# Altium PCB PCB1.PcbDoc
Units mm, origin at the board's own origin, x right, y up, seen from the top; angles counter-clockwise.
Board outline 51.8 x 47.1 mm, 2 copper layers (Top Layer, Bottom Layer), stack 0.325 mm thick; 31 components, 45 nets, 179 pads, 72 vias.
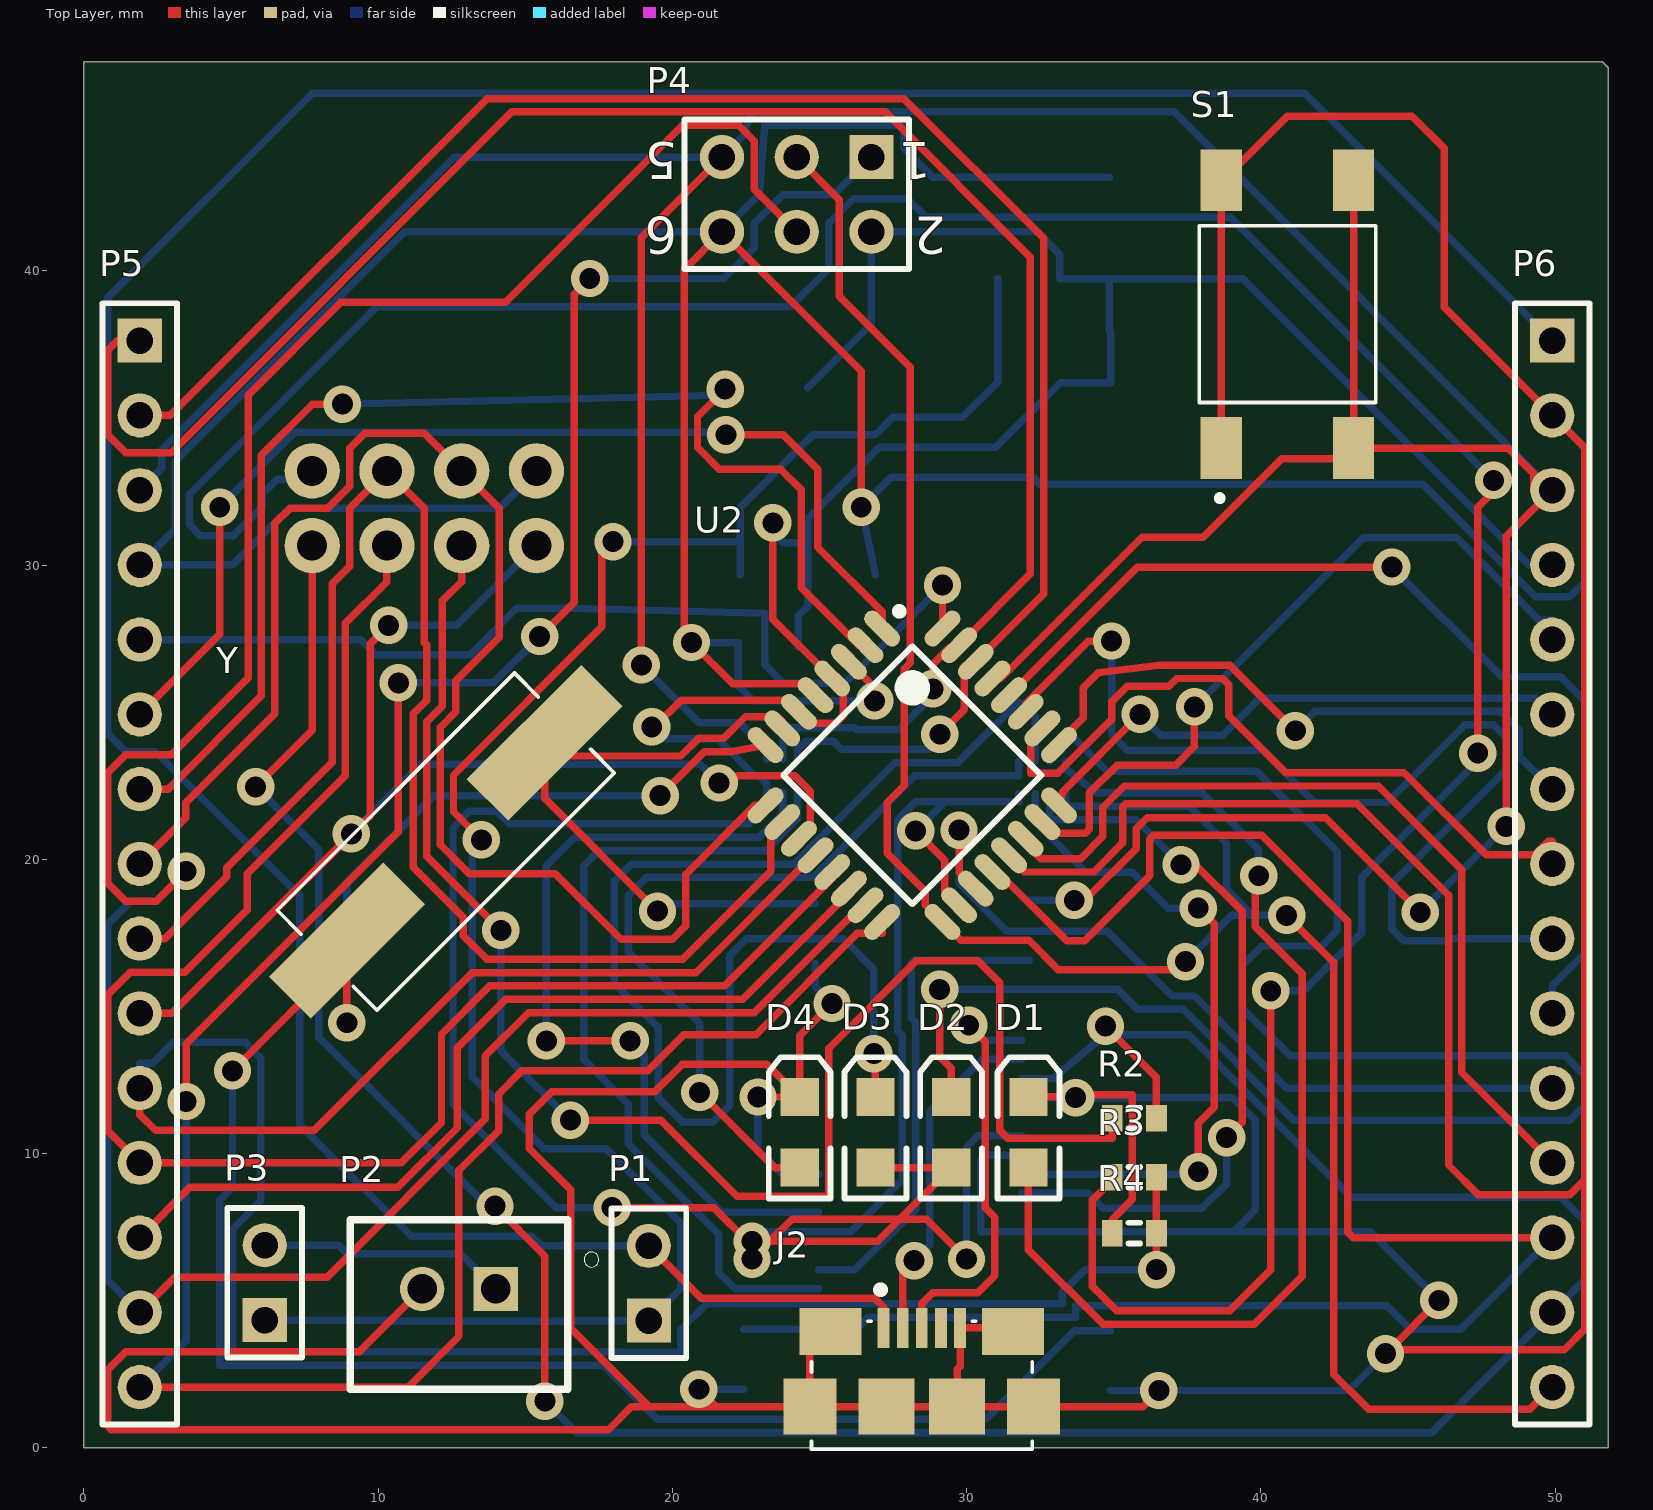
[diagram p0: Top Layer view]
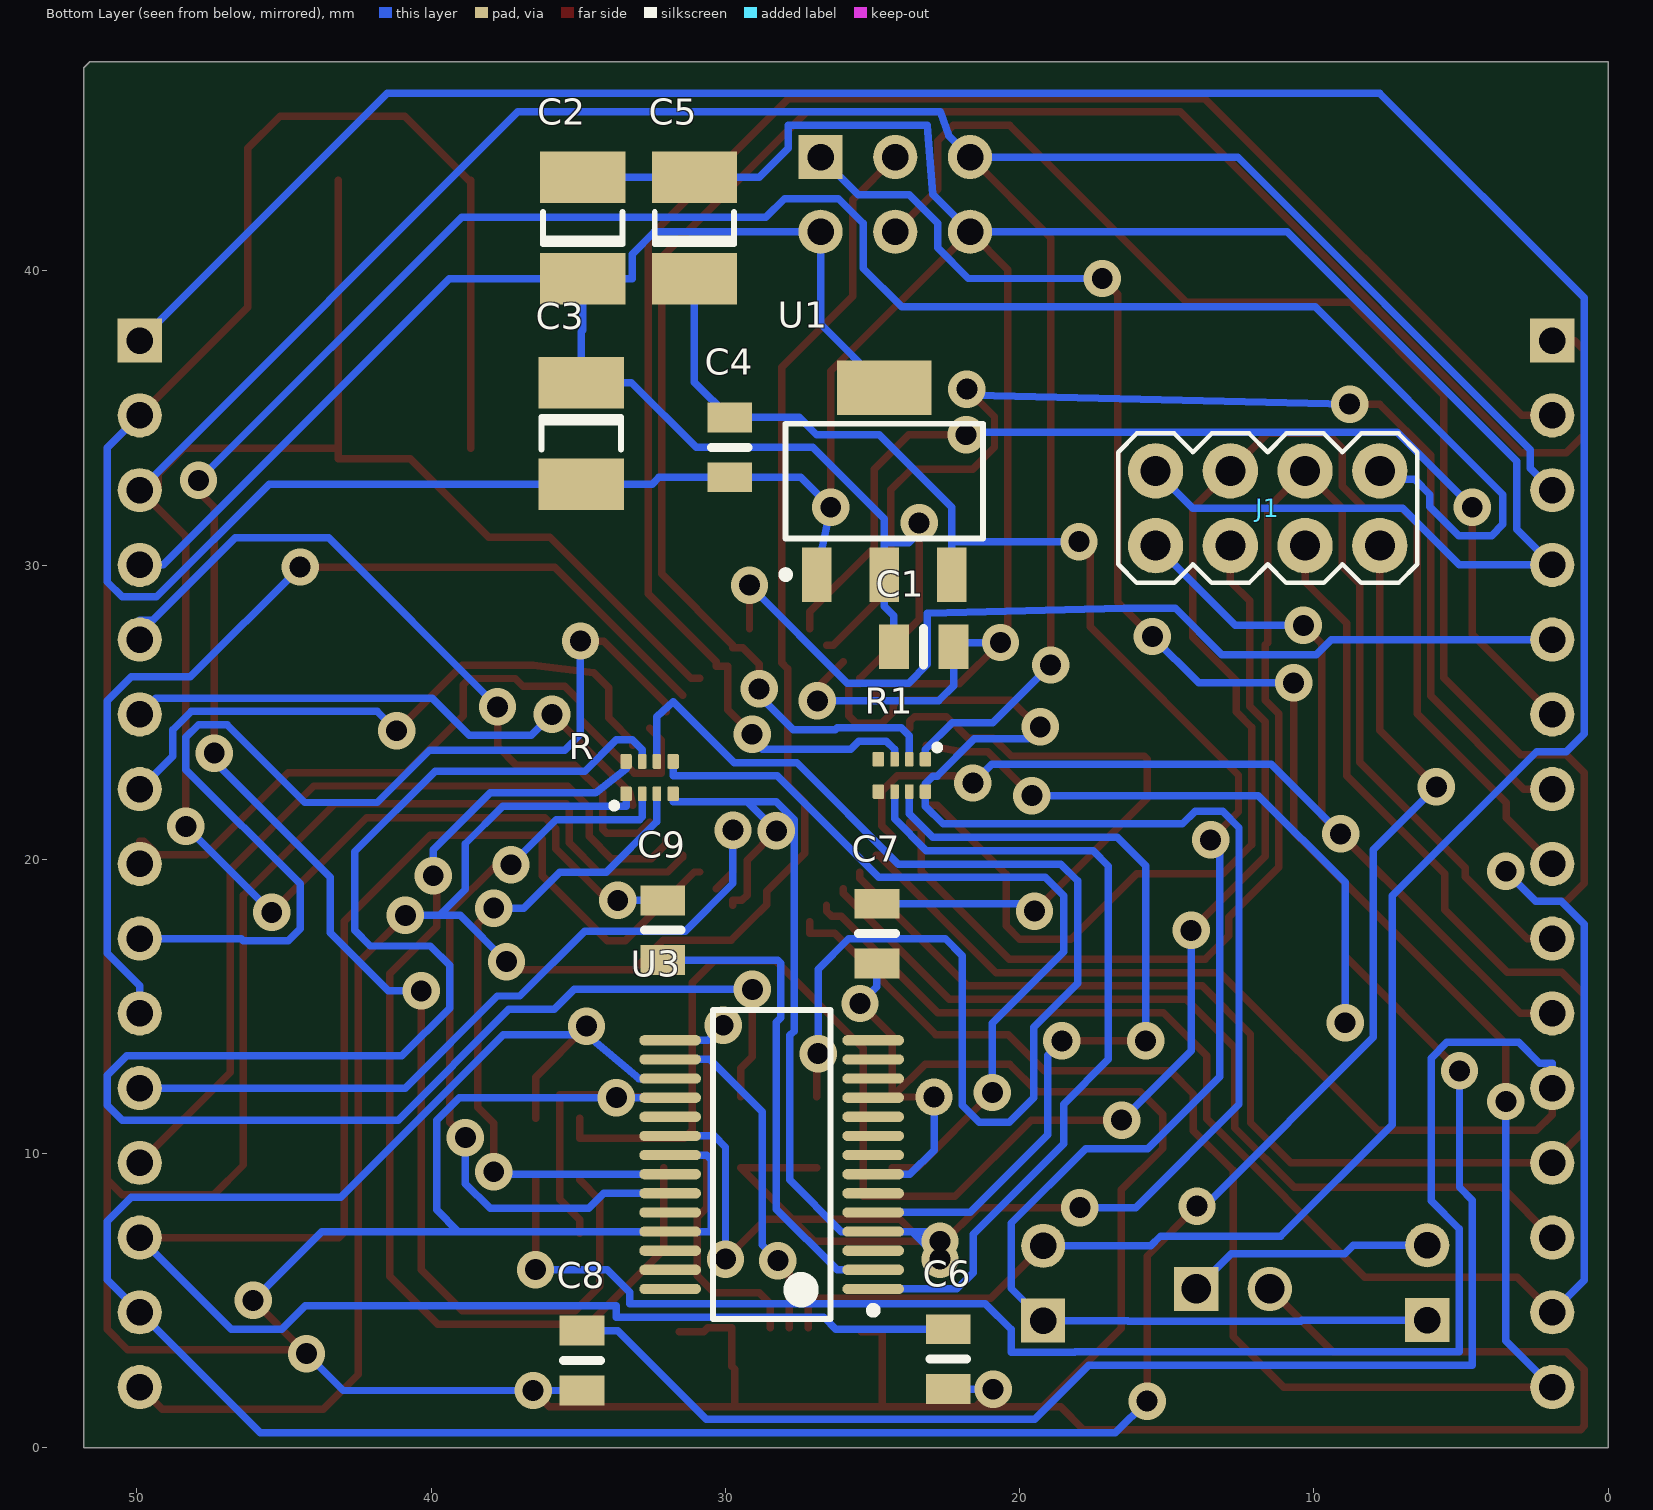
[diagram p1: Bottom Layer view, seen from below]
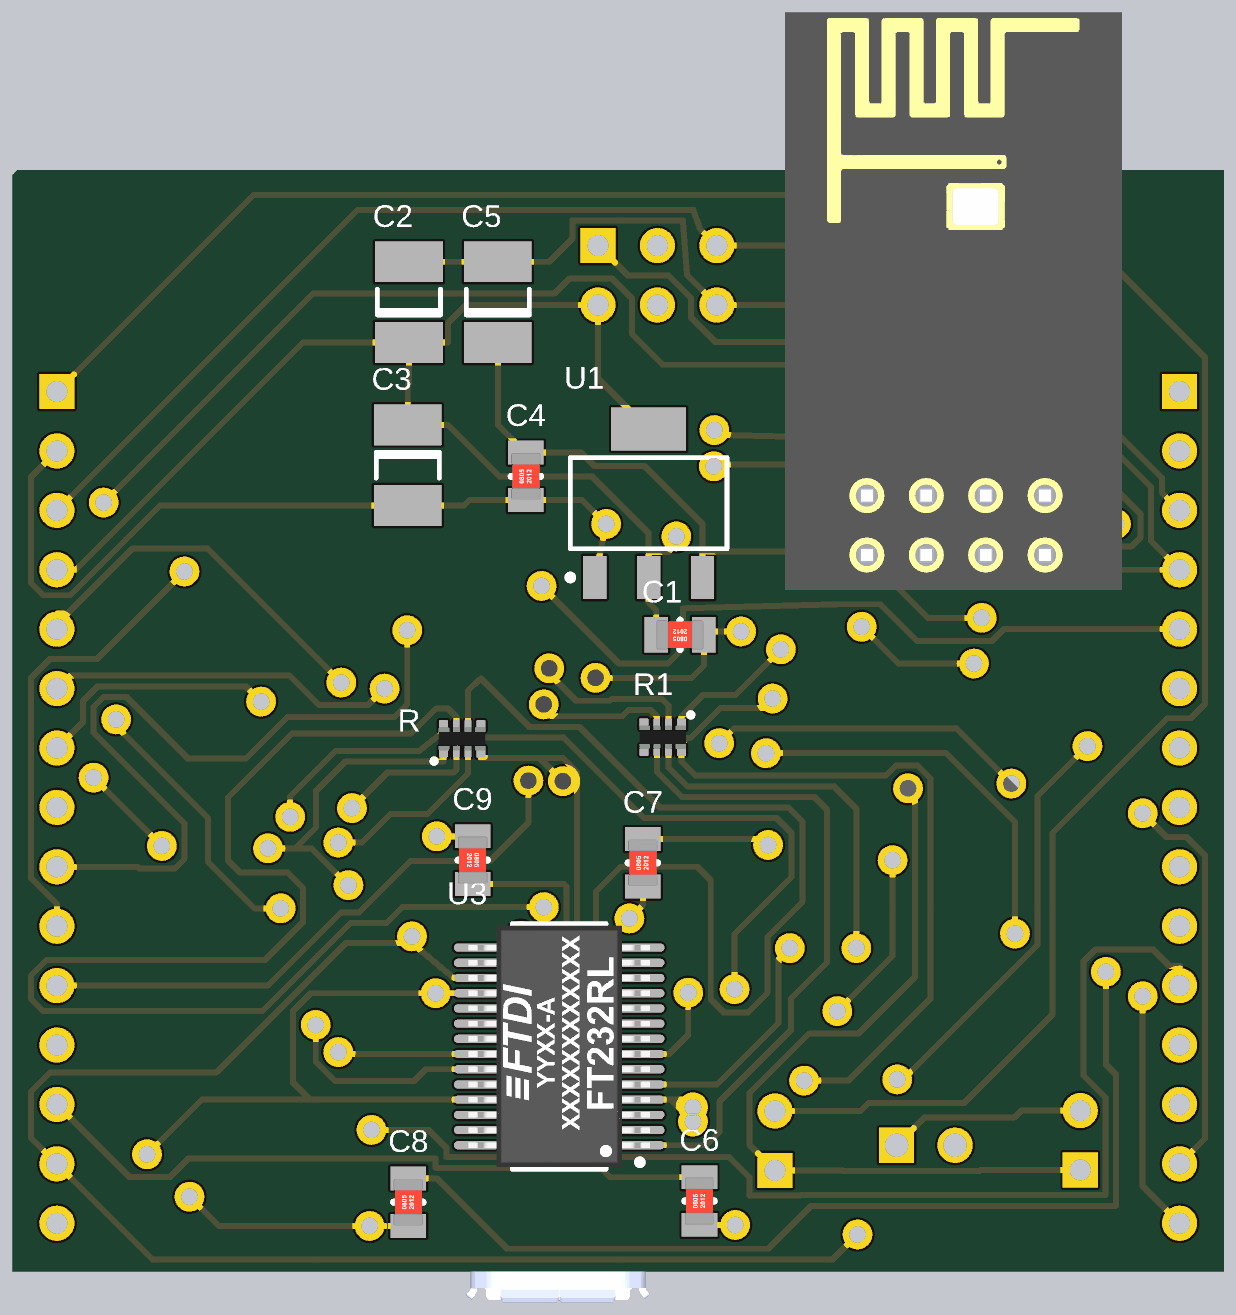
[diagram p2: 3D render of the assembled board from below, using the file's embedded part models]

## Layer stack, top to bottom
Top Solder: solder mask 0.0102, Solder Resist, Dk 3.5
Top Layer: signal copper 0.0356
Dielectric 1: dielectric 0.254, Dk 4.2
Bottom Layer: signal copper 0.0356
Bottom Solder: solder mask 0.0102, Solder Resist, Dk 3.5

## Board outline
0,0 0,47.1 51.6,47.1 51.8,46.9 51.8,0

## Design rules (kind name [scope] priority, off if disabled: settings)
Clearance [All] p1: gap=0.2 ignorepadtopadclearanceinfootprint=FALSE
PolygonConnect [All] p1: connectstyle=Relief reliefconductorwidth=0.254 reliefentries=4 polygonreliefangle="90 Angle" airgapwidth=0.254
RoutingVias [All] p1: holewidth=0.711 width=1.27 viastyle="Through Hole" minholewidth=0.711 minwidth=1.27 maxholewidth=0.711 maxwidth=1.27
SolderMaskExpansion [All] p1: expansion=0.102
Width [All] p1: maxlimit=0.254 minlimit=0.254 preferedwidth=0.254
30 further rules are at their usual default settings.

## Components (designator, comment, footprint, x,y, rotation, side; value= is the part's Value field where it differs from the comment)
C1 "100n" SMD-0805C 23.259,27.225 r90 bottom
C2 "49BC475B010M" 49BC-E 34.85,41.45 r90 bottom value=4.7uF
C3 "49BC475B010M" 49BC-E 34.9,34.475 r270 bottom value=4.7uF
C4 "100n" SMD-0805C 29.85,34 r180 bottom
C5 "49BC475B010M" 49BC-E 31.05,41.45 r90 bottom value=4.7uF
C6 "100n" SMD-0805C 22.425,3.016 r180 bottom
C7 "18pF" SMD-0805C 24.85,17.475 r180 bottom
C8 "18pF" SMD-0805C 34.875,2.966 r180 bottom
C9 "100n" SMD-0805C 32.125,17.591 r0 bottom
D1 "Orange" 2.0X1.25X0.8 32.1,10.725 r90 top
D2 "Red" 2.0X1.25X0.8 29.475,10.725 r90 top
D3 "Green" 2.0X1.25X0.8 26.9,10.725 r90 top
D4 "Blue" 2.0X1.25X0.8 24.325,10.725 r90 top
J1 "ESP-01" ESP-01 11.57,31.93 r180 bottom
J2 "10118192-0001LF" AMPHENOL_10118192-0001LF 28.475,4.075 r0 top
P1 "Header 2" HDR1X2 19.2,4.325 r90 top
P2 "XHP-2" JST_XHP-2 12.75,5.4 r0 top
P3 "Header 2" HDR1X2 6.146,4.343 r90 top
P4 "ICSP" HDR2X3 26.765,43.865 r180 top
P5 "Header 15" HDR1X15 1.9,37.625 r270 top
P6 "Header 15" HDR1X15 49.9,37.625 r270 top
R "MNR04M0APJ334" RESCAXS50P200X100X45-8N 32.575,22.775 r90 bottom
R1 "MNR04M0APJ334" RESCAXS50P200X100X45-8N 24,22.85 r270 bottom
R2 "Res3" J1-0603 35.7,11.2 r180 top value=10K
R3 "Res3" J1-0603 35.7,9.2 r0 top value=220
R4 "Res3" J1-0603 35.7,7.3 r180 top value=330
S1 "2-1437565-9" SW_2-1437565-9 40.9,38.525 r90 top
U1 "REG1117" TI-DCY4_N 24.6,32.85 r90 bottom
U2 "ATMEGA328P-AU" TQFP80P900X900X120-32N 28.154,22.857 r315 top
U3 "FT232RL-Tube" SSOP-28_N 28.425,9.625 r0 bottom
Y "ECS-160-S-5PX-TR" XTAL_ECS-160-S-5PX-TR 12.3,20.6 r45 top

## Footprints (in the part's own frame and the unit in brackets; to place one, negate y for a bottom-side part, rotate by r counter-clockwise, add the part's x,y. Pads: shape width x height; smd on the part's side, far side on the other; paste and mask are expansions set on the pad)
2.0X1.25X0.8 [mm] "SM LED; 2 Flat Leads"
  rect 1.3x1.3 smd: 1(-1.2,0) 2(1.2,0)
  silkscreen extent -2.25,-1.05 2.55,1.05
49BC-E [mm] "Chip Capacitor; Body 3.81 x 2.54 mm (LxW typ)"
  rect 1.75x2.9 smd: 1(-1.725,0) 2(1.725,0)
  silkscreen extent -0.55,-1.35 0.55,1.35
AMPHENOL_10118192-0001LF [mm]
  rect 0.4x1.35 smd: 1(-1.3,0) 2(-0.65,0) 3(0,0) 4(0.65,0) 5(1.3,0)
  rect 2.1x1.6 smd: SH1(-3.1,-0.125) SH2(3.1,-0.125)
  rect 1.8x1.9 smd: SH3(-3.8,-2.675) SH6(3.8,-2.675)
  rect 1.9x1.9 smd: SH4(-1.2,-2.675) SH5(1.2,-2.675)
  silkscreen extent -3.75,-4.13 3.75,1.4, body extent -3.96,-5.4 3.96,0.27, height 2.5
ESP-01 [mil]
  round 74 hole 40: 1(-150,-50) 2(-150,50) 3(-50,-50) 4(-50,50) 5(50,-50) 6(50,50) 7(150,-50) 8(150,50)
  silkscreen extent -200,-100 200,100, body extent -283,-110 283,862, height 256
HDR1X2 [mm] "Connector; Header; 2 Position"
  rect 1.5x1.5 hole 0.9: 1(0,0)
  round 1.5 hole 0.9: 2(2.54,0)
  silkscreen extent -1.27,-1.27 3.81,1.27
HDR1X15 [mm] "Connector; Header; 15 Position"
  rect 1.5x1.5 hole 0.9: 1(0,0)
  round 1.5 hole 0.9: 2(2.54,0) 3(5.08,0) 4(7.62,0) 5(10.16,0) 6(12.7,0) 7(15.24,0) 8(17.78,0) 9(20.32,0) 10(22.86,0) 11(25.4,0) 12(27.94,0) 13(30.48,0) 14(33.02,0) 15(35.56,0)
  silkscreen extent -1.27,-1.27 36.83,1.27
HDR2X3 [mm] "Connector; Header; 3x2 Position"
  rect 1.5x1.5 hole 0.9: 1(0,0)
  round 1.5 hole 0.9: 2(0,2.54) 3(2.54,0) 4(2.54,2.54) 5(5.08,0) 6(5.08,2.54)
  silkscreen extent -1.27,-1.27 6.35,3.81
J1-0603 [mm] "Chip Resistor, Body 1.6x0.8mm, IPC High Density"
  rect 0.7x0.9 smd: 1(-0.75,0) 2(0.75,0)
  silkscreen extent -0.2,-0.35 0.2,0.35, body extent -0.85,-0.48 0.85,0.48, height 0.9
JST_XHP-2 [mm]
  rect 1.508x1.508 hole 1: 1(1.25,0)
  round 1.508 hole 1: 2(-1.25,0)
  silkscreen extent -3.7,-3.4 4.75,2.35
RESCAXS50P200X100X45-8N [mm]
  rrect25% 0.5x0.39 smd: 1(-0.55,0.8) 4(-0.55,-0.8) 5(0.55,-0.8) 8(0.55,0.8)
  rrect25% 0.5x0.29 smd: 2(-0.55,0.25) 3(-0.55,-0.25) 6(0.55,-0.25) 7(0.55,0.25)
  silkscreen extent -1.05,1.1 -0.85,1.3, body extent -0.5,-1 0.5,1, height 0.36
SMD-0805C [mil]
  rect 60x40 smd: 1(0,40) 2(0,-40)
  silkscreen extent -25,0 25,0, body extent -25,-39 25,39, height 35
SSOP-28_N [mm] "SOP, 28-Leads, Body 10.2x5.3mm, Pitch 0.65mm, IPC Medium Density"
  oval 2.1x0.35 smd: 1(-3.45,4.225) 2(-3.45,3.575) 3(-3.45,2.925) 4(-3.45,2.275) 5(-3.45,1.625) 6(-3.45,0.975) 7(-3.45,0.325) 8(-3.45,-0.325) 9(-3.45,-0.975) 10(-3.45,-1.625) 11(-3.45,-2.275) 12(-3.45,-2.925) 13(-3.45,-3.575) 14(-3.45,-4.225) 15(3.45,-4.225) 16(3.45,-3.575) 17(3.45,-2.925) 18(3.45,-2.275) 19(3.45,-1.625) 20(3.45,-0.975) 21(3.45,-0.325) 22(3.45,0.325) 23(3.45,0.975) 24(3.45,1.625) 25(3.45,2.275) 26(3.45,2.925) 27(3.45,3.575) 28(3.45,4.225)
  silkscreen extent -3.57,-5.25 2,5.25, body extent -3.88,-5.16 3.88,5.17, height 2.16
SW_2-1437565-9 [mm]
  rect 2.1x1.4 smd: 1(-4.55,2.25) 2(4.55,2.25) 3(-4.55,-2.25) 4(4.55,-2.25)
  silkscreen extent -6.35,-3 3,3, body extent -5,-3 5,3, height 4.36
TI-DCY4_N [mm] "SOT223, 4-Leads, Body 6.5x3.5mm, Pitch 2.3mm, IPC Medium Density"
  rect 1.85x1 smd: 1(-3.175,2.3) 2(-3.175,0) 3(-3.175,-2.3)
  rect 1.85x3.2 smd: 4(3.175,0)
  silkscreen extent -3.3,-3.35 1.95,3.48, body extent -1.85,-3.35 1.85,3.35, height 1.8
TQFP80P900X900X120-32N [mm] "TQFP, 32-Leads, Body 7.00x7.00mm, Pitch 0.80mm, IPC Medium Density"
  oval 1.5x0.55 smd: 1(-4.25,2.8) 2(-4.25,2) 3(-4.25,1.2) 4(-4.25,0.4) 5(-4.25,-0.4) 6(-4.25,-1.2) 7(-4.25,-2) 8(-4.25,-2.8) 17(4.25,-2.8) 18(4.25,-2) 19(4.25,-1.2) 20(4.25,-0.4) 21(4.25,0.4) 22(4.25,1.2) 23(4.25,2) 24(4.25,2.8)
  oval 0.55x1.5 smd: 9(-2.8,-4.25) 10(-2,-4.25) 11(-1.2,-4.25) 12(-0.4,-4.25) 13(0.4,-4.25) 14(1.2,-4.25) 15(2,-4.25) 16(2.8,-4.25) 25(2.8,4.25) 26(2,4.25) 27(1.2,4.25) 28(0.4,4.25) 29(-0.4,4.25) 30(-1.2,4.25) 31(-2,4.25) 32(-2.8,4.25)
  silkscreen extent -4.37,-3.1 3.1,3.75, body extent -4.5,-4.5 4.5,4.5, height 1.6
XTAL_ECS-160-S-5PX-TR [mm]
  rect 5.5x2 smd: 1(-4.75,0) 2(4.75,0)
  silkscreen extent -5.7,-2.4 5.7,2.4, body extent -6.34,-2.49 6.46,2.51, height 4.5

## Part data
C1 C4 C6 C7 C8 C9: library part GQM2195C2A180JB01D, "CAP CER 18PF 100V NP0 0805", Digi-Key Part Number=490-3606-1-ND, Manufacturer="Murata Electronics North America", Operating Temperature="-55°C ~ 125°C", Package / Case="0805 (2012 Metric)", Ratings=-, Temperature Coefficient="C0G, NP0", Tolerance=±5%, Voltage=50V, @ qty=0, Applications="RF, Microwave, High Frequency", Datasheets=http://www.murata.com/~/media/webrenewal/support/library/catalog/products/capacitor/mlcc/c02e.pdf, Factory Stock=0, Features="High Q, Low Loss", Height - Seated (Max)=-, Image=//media.digikey.com/Renders/Murata%20Renders/0805(GxM9).jpg, Lead Spacing=-, Lead Style=-, Minimum Quantity=1, Mounting Type="Surface Mount, MLCC", Packaging="Cut Tape (CT)", Part Number=GQM2195C2A180JB01D, Part Status=Active, Quantity Available=8724, Series=GQM, Size / Dimension="0.079\" L x 0.049\" W (2.00mm x 1.25mm)", Thickness (Max)="0.037\" (0.95mm)", Unit Price (USD)=0.91
C2 C3 C5: "Conformal Coated Solid Tantalum Chip Capacitor: 4.7uF, 20% Tolerance, 10 WVDC @ -55°C to +85°C, Surge = 13V", ComponentLink1Description="Manufacturer Link", ComponentLink1URL=http://www.vishay.com/, DatasheetDocument=05-Jul-2002, Note="See Data Sheet for full range of components", PackageReference=49BC-E, Published=19-Mar-2004, Publisher="Altium Limited"
D1: library part HSMQ-C170, LED_Colour=Green, ComponentLink1Description="Manufacturer Link", ComponentLink1URL=http://www.avagotech.com/, ComponentLink2Description=Datasheet, ComponentLink2URL=http://cp.literature.agilent.com/litweb/pdf/5988-4832EN.pdf, DatasheetVersion=6-Apr-2002, LuminousIntensity="40mcd (Minimum).", PackageDescription="SM LED; 2 Flat Leads", PackageReference=2.0X1.25X0.8, PackageVersion=Oct-2001, PCB_Layout="Complies with manufacturer's recommendation.", Published=11-Dec-2002, Publisher="Altium Limited"
D2 D4: library part HSMQ-C170, "SMT Top Mount Chip LED, Green", LED_Colour=Green, ComponentLink1Description="Manufacturer Link", ComponentLink1URL=http://www.avagotech.com/, ComponentLink2Description=Datasheet, ComponentLink2URL=http://cp.literature.agilent.com/litweb/pdf/5988-4832EN.pdf, DatasheetVersion=6-Apr-2002, LuminousIntensity="40mcd (Minimum).", PackageDescription="SM LED; 2 Flat Leads", PackageReference=2.0X1.25X0.8, PackageVersion=Oct-2001, PCB_Layout="Complies with manufacturer's recommendation.", Published=11-Dec-2002, Publisher="Altium Limited"
D3: library part HSMQ-C170, "SMT Top Mount Chip LED, Green", ComponentLink1Description="Manufacturer Link", ComponentLink1URL=http://www.avagotech.com/, ComponentLink2Description=Datasheet, ComponentLink2URL=http://cp.literature.agilent.com/litweb/pdf/5988-4832EN.pdf, DatasheetVersion=6-Apr-2002, LED_Colour=Green, LuminousIntensity="40mcd (Minimum).", PackageDescription="SM LED; 2 Flat Leads", PackageReference=2.0X1.25X0.8, PackageVersion=Oct-2001, PCB_Layout="Complies with manufacturer's recommendation.", Published=11-Dec-2002, Publisher="Altium Limited"
J1: "ESP-01M ESP8266 DIP Adapter series Transceiver; 802.11 b/g/n (Wi-Fi, WiFi, WLAN) Evaluation Board", Package="Non-Standard AI-Thinker", Availability="Not in stock", Check_prices=https://www.snapeda.com/parts/ESP-01/AI-Thinker/view-part/?ref=eda, MF=AI-Thinker, MP=ESP-01, Price=None, SnapEDA_Link=https://www.snapeda.com/parts/ESP-01/AI-Thinker/view-part/?ref=snap
J2: "Micro USB, Input Output Connectors, B TYPE RECEPTACLE with flange", Package=None, Availability="In Stock", Check_prices=https://www.snapeda.com/parts/10118192-0001LF/Amphenol/view-part/?ref=eda, MF="AMPHENOL ICC / FCI", MP=10118192-0001LF, Price=None, SnapEDA_Link=https://www.snapeda.com/parts/10118192-0001LF/Amphenol/view-part/?ref=snap
P1 P3: "Header, 2-Pin", LatestRevisionDate=17-Jul-2002, LatestRevisionNote="Re-released for DXP Platform.", Publisher="Altium Limited"
P2: "XH Series 2 Position 2.5 mm Pitch Wire-to-Board Housing Connector", Package=None, Availability=Unavailable, MP=XHP-2, Price=None
P4: library part "Header 3X2", "Header, 3-Pin, Dual row", LatestRevisionDate=17-Jul-2002, LatestRevisionNote="Re-released for DXP Platform.", Publisher="Altium Limited"
P5 P6: "Header, 15-Pin", LatestRevisionDate=17-Jul-2002, LatestRevisionNote="Re-released for DXP Platform.", Publisher="Altium Limited"
R R1: "Res Array 330K Ohm 5% ±200ppm/°C ISOL Epoxy 8-Pin 0804(4 X 0402) Convex SMD Automotive T/R", Package="0402 Rohm", Availability=Unavailable, MF=Rohm, MP=MNR04M0APJ334, Price=None, SnapEDA_Link=https://www.snapeda.com/parts/MNR04M0APJ334/Rohm/view-part/472925/?ref=snap
R2 R3 R4: "Resistor", LatestRevisionDate=29-May-2009, LatestRevisionNote="IPC-7351 Footprint Added.", PackageDescription="Chip Resistor", PackageReference=J1-0603, Published=8-Jun-2000, Publisher="Altium Limited"
S1: Package=None, Availability=Unavailable, MF="{'manufacturer': 'TE Connectivity'}", MP=2-1437565-9, Price=None
U1: "Single Output LDO, 800 mA, Adjustable 1.5 to 13.5 V Output, 3.8 to 15 V Input, with Internal Current Limiting, 4-pin SOT-223 (DCY), -40 to 125 degC, Green (RoHS & no Sb/Br)", Manufacturer="Texas Instruments", Rating=Catalog, Supplier Part Number 1=REG1117-ND, Code_JEDEC=TO-261, ComponentLink1Description="Manufacturer URL", ComponentLink1URL=http://www.ti.com/, ComponentLink2Description=Datasheet, ComponentLink2URL=http://www.ti.com/general/docs/lit/getliterature.tsp?genericPartNumber=REG1117&fileType=pdf, ComponentLink3Description="Package Specification", ComponentLink3URL=http://www.ti.com/litv/pdf/mpds094a, DatasheetVersion=SBVS001D, Eco-Plan="Green (RoHS & no Sb/Br)", Iout(Max)(A)=0.8, Iq(Typ)(mA)=4, Mounting Technology="Surface Mount", PackageDescription="4-Pin Plastic Small Outline, Body 3.5 x 6.5 mm, Pitch 2.3 mm", PackageReference=DCY4, PackageVersion=4202506/B, PartNumber=REG1117, SubFamily="Single Channel LDO", Supplier 1=Digi-Key, Supplier 2=Farnell, Supplier 3=Newark, Supplier 4=Mouser, Supplier Part Number 2=1097566, Supplier Part Number 3=14P6981, Supplier Part Number 4=595-REG1117, Vdo(Typ)(mV)=1100, Vin(Max)(V)=15, Vin(Min)(V)=3.8, Vout Adj(Max)(V)=13.5, Vout Adj(Min)(V)=1.25
U2: "Microchip ATMEGA328P-AU, 8bit AVR Microcontroller, ATmega, 20MHz, 32 kB Flash, 32-Pin TQFP", Created by="Mariano Franceschetti", Datasheet URL=https://ww1.microchip.com/downloads/en/DeviceDoc/Atmel-7810-Automotive-Microcontrollers-ATmega328P_Datasheet.pdf, Date created=05-03-2023, GigiKey Stock N°=2156-ATMEGA328P-AU-ND
U3: "USB UART Asynchronous Serial Data Transfer Chip, SSOP-28, Tube", ComponentLink1Description="Manufacturer Link", ComponentLink1URL=http://www.ftdichip.com/Products/ICs/FT232R.htm, ComponentLink2Description=Datasheet, ComponentLink2URL=http://www.ftdichip.com/Support/Documents/DataSheets/ICs/DS_FT232R.pdf, DatasheetVersion="ver 2.07, Jul-2010", PackageDescription="28-Pin Small Outline Package 0.65 mm Pitch", PackageReference=SSOP-28, PackageVersion=2010, Published=19-Aug-2010, Publisher="Altium Limited"
Y: "16MHz ±30ppm Crystal Series 40 Ohms HC-49/US", Package="HC49/US ECS International", Availability=Unavailable, MF="ECS Inc.", MP=ECS-160-S-5PX-TR, Price=None, SnapEDA_Link=https://www.snapeda.com/parts/ECS-160-S-5PX-TR/ECS%20Inc./view-part/2457269/?ref=snap

## Via types
v1: diameter 1.27, hole 0.711, Top Layer to Bottom Layer, 72 vias

## Nets (pads, with @x,y where several pads share a name; then routed paths per layer and width w, separated by ;. In a path a pad name is that pad's centre, name@x,y a point inside that pad or via, vN(x,y) a via of type N, cw(c..) or ccw(c..) an arc to the next point about the centre after c; other vN are vias at no path point)
3V3: J1.7 P6.14 R2.1 U3.17 | length 100.5
  Top Layer w0.254: v1(5.84,22.464) 7.76,24.385 J1.7 ; v1(13.974,8.215) 15.669,6.52 v1(15.669,1.586) ; v1(34.719,14.33) 36.45,12.598 R2.1
  Bottom Layer w0.254: v1(5.84,22.464) 7.976,20.328 7.976,13.95 13.711,8.215 v1(13.974,8.215) ; v1(15.669,1.586) 16.748,0.507 45.802,0.507 P6.14 51.001,5.706 51.001,7.707 50.188,8.52 43.076,8.52 37.554,14.042 v1@34.719,14.042 ; U3.17 32.939,12.55 v1@34.719,14.042 ; v1(34.719,14.33) v1@34.719,14.042
7V2: P2.1 P3.2 | length 8.5
  Bottom Layer w0.254: P3.2 8.659,6.883 8.953,6.589 12.811,6.589 P2.1
A0: P6.5 U2.23 | length 25
  Top Layer w0.254: U2.23 32.949,20.89 34.034,20.89 34.172,21.027 34.172,22.257 35.116,23.201 37.107,23.201 37.742,23.836 v1(37.742,25.182)
  Bottom Layer w0.254: v1(37.742,25.182) 43.482,30.923 46.657,30.923 49.451,28.129 49.9,28.129 P6.5
A1: P6.6 U2.24 | length 19.3
  Top Layer w0.254: U2.24 33.269,22.303 v1(35.891,24.925)
  Bottom Layer w0.254: v1(35.891,24.925) 36.601,24.215 38.698,24.215 39.961,25.477 49.348,25.477 P6.6
A2: P6.7 U2.25 | length 21.3
  Top Layer w0.254: U2.25 33.139,23.981 33.967,24.809 33.967,25.833 34.475,26.341 36.529,26.598 38.942,26.598 v1(41.171,24.369)
  Bottom Layer w0.254: v1(41.171,24.369) 41.825,25.023 48.156,25.023 48.785,24.395 48.785,23.5 P6.7
A3: P6.8 U2.26 | length 25.2
  Top Layer w0.254: U2.26 32.179,24.054 32.179,22.922 33.088,22.922 34.929,24.762 34.929,25.36 35.456,25.887 36.875,25.887 37.132,26.144 38.698,26.144 38.91,25.932 38.91,24.878 40.843,22.945 44.861,22.945 47.65,20.156 49.302,20.156 49.764,20.618 49.9,20.618 P6.8
A4: P6.9 U2.27 | length 36.6
  Top Layer w0.254: U2.27 32.007,25.293 34.132,27.417 v1(34.923,27.417)
  Bottom Layer w0.254: v1(34.923,27.417) 34.923,24.242 35.456,23.709 40.053,23.709 41.831,21.931 44.295,21.931 46.934,24.569 47.902,24.569 48.331,24.141 48.331,23.045 44.451,19.166 44.451,17.638 44.854,17.235 46.375,17.235 46.445,17.305 P6.9
A5: P6.10 U2.28 | length 34.3
  Top Layer w0.254: U2.28 35.795,29.932 v1(44.448,29.932)
  Bottom Layer w0.254: v1(44.448,29.932) 48.181,26.198 50.188,26.198 51.001,25.385 51.001,16.809 49.9,15.708 P6.10
A6: P6.11 U2.19 | length 27.1
  Top Layer w0.254: v1(29.741,20.991) 29.753,20.979 29.753,19.56 U2.19
  Bottom Layer w0.254: v1(29.741,20.991) 29.741,19.188 31.367,17.562 34.773,17.562 36.98,15.355 37.749,15.355 40.879,12.225 P6.11
A7: P6.12 U2.22 | length 29.2
  Top Layer w0.254: U2.22 32.007,20.534 32.515,20.026 33.873,20.026 34.626,20.779 34.626,21.761 35.356,22.491 43.986,22.491 46.829,19.649 46.829,12.756 P6.12
AREF: C6.1 P6.13 U2.20 | length 63.7
  Top Layer w0.254: U2.20 31.062,19.569 33.398,17.232 34.008,17.232 36.215,19.439 36.215,20.683 36.345,20.813 40.028,20.813 42.949,17.892 42.949,7.326 43.13,7.145 P6.13
  Bottom Layer w0.254: C6.1 26.244,4.032 26.649,4.437 33.706,4.437 33.706,4.837 44.274,4.837 45.076,4.035 46.79,4.035 P6.13
BLUE: C1.1 C2.1 C3.1 D2.1 D3.1 P4.2 P6.4 R1.8 R.4 U1.2 U1.4 U2.4 U2.6 U2.18 U3.4 U3.20 | length 166.3
  Top Layer w0.254: v1(17.955,8.164) 21.41,8.164 v1@22.629,6.945 ; v1(19.3,24.5) 19.389,24.5 20.3,25.411 24.128,25.411 24.3,25.238 U2.6 24.69,24.623 25.55,24.623 25.804,24.877 25.804,25.97 25.431,25.97 U2.4 23.416,28.16 v1(23.416,31.431) ; v1(22.705,6.412) v1@23.315,7.021 ; v1(22.705,7.021) v1@23.315,7.021 ; D3.1 D2.1 27.727,7.777 ; v1(28.268,20.966) 29.258,19.975 29.258,18.781 29.436,18.604 29.745,18.604 U2.18 ; v1(29.995,6.412) 28.63,7.777 27.727,7.777 ; v1@23.315,7.021 24.07,7.777 27.727,7.777 ; v1@23.315,7.021 26.971,7.021 27.727,7.777
  Bottom Layer w0.254: v1(17.955,8.164) 16.057,8.164 12.545,11.676 12.545,21.078 13.104,21.636 14.034,21.636 14.469,21.201 22.597,21.201 23.2,21.804 R1.8 23.2,22.566 22.946,22.82 22.807,22.82 21.537,24.09 19.71,24.09 v1(19.3,24.5) v1@19.3,24.774 ; v1@22.629,6.945 v1(22.705,7.021) 23.034,7.35 23.644,7.35 ; v1(22.705,6.412) 23.644,7.35 ; v1(23.416,31.431) 23.416,31.111 23.772,30.755 24.6,30.755 ; C1.1 24.275,28.281 24.6,28.606 U1.2 24.6,30.755 ; U1.4 26.765,38.19 P4.2 32.408,41.325 33.17,40.563 33.17,39.725 C2.1 ; v1(28.268,20.966) 29.255,21.953 31.775,21.953 31.775,21.956 ; v1(29.995,6.412) 29.995,10.218 30.377,10.6 U3.20 ; R.4 31.775,21.956 ; P6.4 49.105,30.005 39.385,39.725 C2.1 ; 23.644,7.35 U3.4 26.058,7.35 27.812,9.104 27.812,14.017 27.665,14.165 27.665,21.353 28.268,21.956 31.775,21.956 ; 24.6,30.755 24.6,31.573 27.023,33.996 30.986,33.996 33.19,36.2 C3.1 34.9,37.933 34.85,37.983 C2.1
"D0 RX": P5.2 R1.3 U2.30 | length 61.4
  Top Layer w0.254: P5.2 2.941,35.085 13.706,45.85 27.869,45.85 32.619,41.1 32.619,29.019 U2.30 30.31,26.554 29.919,26.554 29.919,25.081 v1(29.087,24.249)
  Bottom Layer w0.254: R1.3 24.25,23.733 24.534,24.017 25.461,24.017 25.735,23.742 28.739,23.742 29.087,24.09 v1(29.087,24.249)
"D1 TX": P5.1 R1.2 U2.31 | length 65.5
  Top Layer w0.254: P5.1 1.137,37.625 0.81,37.298 0.81,34.428 1.42,33.818 2.969,33.818 14.547,45.396 27.231,45.396 32.165,40.462 32.165,29.697 U2.31 29.745,27.189 29.411,27.189 28.852,26.63 v1(28.852,25.792)
  Bottom Layer w0.254: R1.2 23.75,24.195 24.026,24.471 26.191,24.471 26.257,24.405 27.694,24.405 28.852,25.563 v1(28.852,25.792)
D2: P5.5 U2.32 | length 33
  Top Layer w0.254: U2.32 v1(29.179,29.314)
  Bottom Layer w0.254: P5.5 9.413,27.465 9.921,26.957 13.129,26.957 14.704,28.532 16.454,28.532 23.137,28.357 23.137,26.624 23.772,25.989 25.853,25.989 v1(29.179,29.314)
D3: P5.6 U2.1 | length 36.4
  Top Layer w0.254: P5.6 4.62,27.645 v1(4.62,31.964) ; v1(21.816,34.428) 23.772,34.428 24.94,33.259 24.94,30.596 27.128,28.408 U2.1
  Bottom Layer w0.254: v1(4.62,31.964) 7.164,34.507 21.737,34.507 v1(21.816,34.428)
D4: P5.7 U2.2 | length 43
  Top Layer w0.254: P5.7 2.865,22.385 6.036,25.557 6.036,33.736 7.77,35.469 v1(8.786,35.469) ; v1(21.791,35.977) 20.854,35.041 20.854,33.996 21.596,33.255 23.675,33.255 24.378,32.551 24.378,29.224 26.326,27.276 U2.2
  Bottom Layer w0.254: v1(8.786,35.469) 21.583,35.769 v1(21.791,35.977)
D5: J1.4 P5.8 U2.9 | length 51.7
  Top Layer w0.254: P5.8 3.466,21.411 3.466,21.922 6.49,24.947 6.49,31.416 7.008,31.933 8.285,31.933 9.033,32.682 9.033,33.964 9.548,34.479 11.561,34.479 J1.4 14.11,31.93 14.11,27.544 12.64,26.074 12.64,25.012 12.108,24.48 12.108,20.502 13.094,19.516 16.023,19.516 18.263,17.276 19.993,17.276 20.457,17.74 20.457,19.485 22.804,21.831 U2.9
D6: J1.6 P5.9 U2.10 | length 51.2
  Top Layer w0.254: P5.9 2.757,17.305 4.852,19.4 4.852,19.714 8.437,23.298 8.437,29.367 9.033,29.963 9.033,31.933 J1.6 11.573,31.927 11.573,27.367 11.656,27.284 11.656,25.4 11.2,24.944 11.2,19.737 12.9,18.037 12.9,17.406 13.7,16.606 20.356,16.606 23.34,19.591 23.34,21.093 23.734,21.093 U2.10
D9: J1.5 P5.12 U2.13 | length 56
  Top Layer w0.254: J1.5 10.3,29.424 8.891,28.015 8.891,22.844 5.552,19.506 5.552,18.291 3.427,16.165 1.572,16.165 0.81,15.403 0.81,10.775 P5.12 10.792,9.685 12.154,11.047 12.154,14.052 13.8,15.698 21.773,15.698 25.431,19.357 U2.13
D10: P5.13 U2.14 | length 30.7
  Top Layer w0.254: P5.13 3.605,8.85 10.666,8.85 12.685,10.869 12.685,13.594 14.335,15.244 22.394,15.244 25.997,18.847 U2.14
GND: C1.2 C2.2 C3.2 C4.2 C5.2 C6.2 C7.2 C8.2 D1.2 D4.2 J1.2 J2.5 J2.SH1 J2.SH2 J2.SH3 J2.SH4 J2.SH5 J2.SH6 P2.2 P4.6 P5.4 P6.2 R4.2 S1.1 S1.2 U1.1 U2.3 U2.5 U2.21 U3.7 U3.18 U3.21 U3.25 | length 380.2
  Top Layer w0.254: P2.2 9.362,3.262 1.42,3.262 0.81,2.652 0.81,0.747 0.937,0.62 17.828,0.62 18.608,1.4 19.208,1.4 ; v1(20.902,1.992) 21.494,1.4 ; v1(22.908,11.923) 24.323,11.923 D4.2 ; U2.5 24.866,25.79 24.686,25.97 22.045,25.97 v1(20.648,27.367) 20.4,27.614 20.4,40.04 P4.6 26.418,36.592 v1(26.418,31.964) ; J2.SH1 24.661,3.95 J2.SH3@24.661,1.4 ; v1(25.423,15.098) 24.325,14 D4.2 ; U2.3 26.871,25.837 v1(26.871,25.385) ; U2.21 31.442,20.078 31.951,19.569 34.316,19.569 35.307,20.559 35.307,21.782 35.405,21.88 43.279,21.88 46.375,18.785 46.375,9.612 47.391,8.596 50.493,8.596 51.001,9.104 ; J2.SH2 30.73,3.95 30.605,4.075 J2.5 29.775,2.778 29.675,2.678 J2.SH5 ; D1.2 33.68,11.925 v1(33.705,11.9) 33.705,12 35.634,12 35.634,8.442 34.95,7.758 R4.2 ; v1(36.53,1.95) 35.98,1.4 J2.SH6 J2.SH5 ; S1.1 S1.2@38.65,43.007 ; S1.2 S1.2@38.65,43.007 ; v1(46.048,5.015) 44.371,3.338 50.315,3.338 51.001,4.024 51.001,9.104 ; 19.208,1.4 21.494,1.4 ; 19.208,1.4 16.539,4.068 16.539,8.771 15.136,10.174 15.136,11.336 15.898,12.098 19.403,12.098 20.343,13.038 23.212,13.038 D4.2 ; 21.494,1.4 J2.SH3@24.661,1.4 ; J2.SH3@24.661,1.4 J2.SH3 J2.SH4 J2.SH5 ; S1.2@38.65,43.007 40.892,45.248 45.133,45.248 46.226,44.156 46.226,38.759 P6.2 51.001,33.984 51.001,9.104
  Bottom Layer w0.254: J1.2 14.11,31.93 6.984,31.93 5.059,30.005 P5.4 3.114,31.219 3.114,33.527 10.912,41.325 P4.6 22.959,42.599 23.137,44.942 27.861,44.942 27.861,44.156 28.842,43.175 C5.2 C2.2 ; v1(20.648,27.367) 22.243,27.367 C1.2 22.243,25.898 22.756,25.385 v1(26.871,25.385) ; v1(20.902,1.992) 20.91,2 C6.2 ; v1(22.908,11.923) 22.908,10.12 23.728,9.3 U3.7 ; C7.2 24.85,15.671 v1(25.423,15.098) ; U1.1 v1(26.418,31.964) 27.438,32.984 C4.2 32.256,32.984 32.49,32.75 C3.2 45.497,32.75 49.331,28.916 50.493,28.916 51.001,29.424 51.001,33.984 P6.2 ; U3.21 30.63,9.95 30.474,9.794 30.474,7.35 U3.25 39.075,7.35 ; U3.18 v1(33.705,11.9) 39.049,11.9 39.813,11.136 39.813,8.088 39.075,7.35 ; C8.2 v1(36.53,1.95) 42.983,1.95 v1(44.233,3.2) v1@44.371,3.338 ; v1(46.048,5.015) 43.712,7.35 39.075,7.35
GREEN_TX: R.3 U3.22 | length 23.1
  Top Layer w0.254: v1(37.869,9.383) 37.869,11.029 38.409,11.568 38.409,17.803 v1(37.869,18.343)
  Bottom Layer w0.254: U3.22 37.786,9.3 v1(37.869,9.383) ; R.3 32.325,21.284 34.044,19.566 35.631,19.566 36.853,18.343 v1(37.869,18.343)
MCU_RST: C9.2 P4.5 P5.3 P6.3 R1.1 S1.3 S1.4 U2.29 | length 148.3
  Top Layer w0.254: v1(18.946,26.605) 18.946,41.126 P4.5 ; U2.29 31.156,26.145 35.959,30.948 38.047,30.948 40.714,33.615 43.15,33.615 S1.3 ; v1(33.656,18.607) 34.004,18.607 35.761,20.364 35.761,21.042 36.139,21.42 42.19,21.42 v1(45.413,18.197) ; S1.4 S1.3 ; v1(48.334,21.118) 48.334,30.979 P6.3 49.277,32.545 49.277,33.108 48.41,33.975 S1.3
  Bottom Layer w0.254: P5.3 2.648,33.293 2.648,33.924 12.588,43.865 P4.5 22.405,44.585 22.694,45.396 37.049,45.396 P6.3 ; v1(18.946,26.605) 20.906,24.644 22.287,24.644 23.2,23.731 R1.1 ; C9.2 v1(33.656,18.607) ; v1(45.413,18.197) v1(48.334,21.118)
MISO: P4.1 P5.15 U2.16 | length 93.7
  Top Layer w0.254: P5.15 11.018,2.065 12.748,3.795 12.748,9.427 14.101,10.78 14.101,12.025 14.889,12.813 19.156,12.813 20.387,14.044 22.842,14.044 26.284,17.486 27.128,17.486 U2.16 ; v1(3.477,11.771) 3.477,13.725 10.691,20.939 v1(10.691,25.995) ; v1(15.492,27.57) 16.66,28.738 16.66,39.203 v1(17.193,39.736)
  Bottom Layer w0.254: P5.15 3.477,3.642 v1(3.477,11.771) ; v1(10.691,25.995) 13.917,25.995 v1(15.492,27.57) ; v1(17.193,39.736) 21.74,39.736 22.781,40.778 22.781,41.616 23.747,42.581 25.481,42.581 P4.1
MOSI: P4.4 P5.14 U2.15 | length 96.5
  Top Layer w0.254: P5.14 3.097,5.802 8.268,5.802 13.647,11.181 13.647,13.327 15.111,14.79 22.787,14.79 26.061,18.065 26.388,18.065 26.563,18.24 U2.15 ; v1(3.477,19.594) 2.461,18.578 1.42,18.578 0.81,19.188 0.81,22.947 1.42,23.557 2.969,23.557 5.582,26.17 5.582,35.771 8.734,38.922 14.323,38.922 20.343,44.942 22.248,44.942 22.781,44.409 22.781,42.769 P4.4
  Bottom Layer w0.254: P5.14 0.81,5.695 0.81,17.791 1.598,18.578 2.461,18.578 v1(3.477,19.594)
NetC4_1: C4.1 C5.1 P1.1 P3.1 U1.3 | length 67.6
  Top Layer w0.254: v1(13.51,20.661) 12.562,21.609 12.562,22.862 17.6,27.9 17.6,30.415 v1(17.981,30.796)
  Bottom Layer w0.254: P3.1 10.412,4.343 10.451,4.303 16.304,4.303 16.326,4.325 P1.1 20.292,5.417 20.292,7.631 17.752,10.171 15.644,10.171 13.206,12.609 13.206,20.356 v1(13.51,20.661) ; v1(17.981,30.796) 22.3,30.796 ; U1.3 22.3,30.796 ; C5.1 31.05,36.216 C4.1 27.484,35.016 26.902,34.434 24.77,34.434 22.3,31.964 22.3,30.796
NetC7_1: C7.1 U2.7 Y.2 | length 21.2
  Top Layer w0.254: v1(19.495,18.238) 15.659,22.075 15.659,23.4 15.769,23.51 20.29,23.51 20.89,24.111 21.745,24.111 22.486,24.852 23.569,24.852 23.734,24.686 U2.7
  Bottom Layer w0.254: v1(19.495,18.238) 19.748,18.491 C7.1
NetC8_1: C8.1 U2.8 Y.1 | length 71.6
  Top Layer w0.254: v1(5.052,12.812) Y.1@8.941,16.701 ; v1(8.938,14.447) 8.941,14.45 Y.1@8.941,16.701 ; Y.1 Y.1@8.941,16.701 ; v1(19.584,22.163) 21.078,23.657 21.973,23.657 U2.8
  Bottom Layer w0.254: v1(5.052,12.812) 5.052,8.851 4.615,8.414 4.615,2.812 17.651,2.812 19.487,0.976 30.647,0.976 33.653,3.982 C8.1 ; v1(8.938,14.447) 8.938,19.214 11.887,22.163 v1(19.584,22.163)
NetC9_1: C9.1 U3.2 | length 16.6
  Bottom Layer w0.254: U3.2 26.204,6.05 28.268,8.113 28.268,14.467 28.119,14.616 28.119,16.477 28.217,16.575 C9.1
NetD1_1: D1.1 R.8 | length 36.9
  Top Layer w0.254: D1.1 32.1,6.738 34.636,4.202 39.771,4.202 41.4,5.831 41.4,16.114 39.812,17.702 39.812,19.327 v1(39.926,19.442)
  Bottom Layer w0.254: R.8 33.375,23.074 34.415,22.261 37.996,22.261 39.926,20.331 v1(39.926,19.442)
NetD2_2: D2.2 R.7 | length 61.1
  Top Layer w0.254: v1(29.081,15.581) 29.081,13.295 29.475,12.901 D2.2
  Bottom Layer w0.254: v1(29.081,15.581) 35.138,15.581 35.818,14.901 37.354,14.901 41.118,11.136 50.493,11.136 51.001,11.644 51.001,12.66 50.34,13.32 40.996,13.32 39.371,14.946 39.371,16.397 40.028,17.054 42.06,17.054 42.593,17.588 42.593,20.266 39.861,22.998 34.77,22.998 33.703,24.065 33.17,24.065 32.825,23.72 R.7
NetD3_2: D3.2 R.6 | length 44.5
  Top Layer w0.254: v1(26.845,13.397) 26.9,13.342 D3.2
  Bottom Layer w0.254: v1(26.845,13.397) 26.845,16.267 25.804,17.308 22.527,17.308 21.946,16.727 21.946,11.644 21.372,11.069 20.354,11.069 19.527,11.896 19.527,14.289 18.032,15.784 18.032,19.264 18.606,19.839 24.118,19.839 27.566,23.287 29.7,23.287 31.773,25.36 32.325,24.852 R.6
NetD4_1: D4.1 R.5 | length 27.6
  Top Layer w0.254: v1(20.927,12.076) 23.478,9.525 D4.1
  Bottom Layer w0.254: v1(20.927,12.076) 20.927,14.433 18.5,16.86 18.5,18.756 19.129,19.385 24.788,19.385 28.236,22.833 31.775,22.833 R.5
NetJ1_3: J1.3 R2.2 | length 53.9
  Top Layer w0.254: J1.3 12.84,29.439 12.186,28.786 12.186,25.2 11.654,24.668 11.654,20.104 v1(14.171,17.588) ; v1(16.533,11.136) 19.606,11.136 22.197,8.545 25.321,8.545 25.321,13.574 28.293,16.546 30.376,16.546 31.123,15.799 31.123,10.797 31.392,10.528 34.95,10.528 R2.2
  Bottom Layer w0.254: v1(14.171,17.588) 14.171,13.498 v1(16.533,11.136)
NetJ1_8: J1.8 R3.1 | length 101.6
  Top Layer w0.254: R3.1 34.95,9.104 34.262,8.416 34.262,5.497 35.1,4.659 38.936,4.659 40.333,6.056 v1(40.333,15.53) ; v1(47.369,23.607) 47.369,31.964 47.902,32.497 v1(47.902,32.878)
  Bottom Layer w0.254: J1.8 7.76,32.916 6.576,32.916 6.056,32.396 6.056,31.984 5.074,31.002 3.957,31.002 3.579,31.38 3.579,32.396 9.954,38.771 24.001,38.771 25.321,40.092 25.321,41.616 26.16,42.454 27.988,42.454 28.623,41.819 38.961,41.819 v1(47.902,32.878) ; v1(40.333,15.53) 41.45,15.53 43.432,17.511 43.432,19.391 47.369,23.328 v1(47.369,23.607)
NetJ2_2: J2.2 U3.16 | length 11.6
  Top Layer w0.254: J2.2 27.825,5.969 v1(28.217,6.361)
  Bottom Layer w0.254: v1(28.217,6.361) 28.75,6.894 28.75,11.425 30.525,13.2 U3.16
NetJ2_3: J2.3 U3.15 | length 14.6
  Top Layer w0.254: J2.3 28.475,4.892 28.852,5.269 30.376,5.269 30.96,5.853 30.96,7.834 30.63,8.164 30.63,13.803 v1(30.071,14.362)
  Bottom Layer w0.254: v1(30.071,14.362) 30.583,13.85 U3.15
RED_RX: R.2 U3.23 | length 25.6
  Top Layer w0.254: v1(37.285,19.816) 37.771,19.816 39.358,18.229 39.358,11.068 v1(38.834,10.544)
  Bottom Layer w0.254: U3.23 34.135,8.65 34.646,8.139 37.996,8.139 38.834,8.977 v1(38.834,10.544) ; R.2 32.825,21.438 32.916,21.347 35.754,21.347 v1(37.285,19.816)
SCK: P4.3 P6.15 R.1 U2.17 | length 75.7
  Top Layer w0.254: P4.3 25.677,42.413 25.677,39.127 28.09,36.714 28.09,26.681 27.887,26.478 27.887,22.511 27.306,21.93 27.306,20.201 28.598,18.908 28.598,18.453 U2.17 29.793,17.257 32.103,17.257 33.119,16.241 37.437,16.241 v1(37.437,16.521) ; v1(40.873,18.096) 40.866,18.096 42.466,16.495 42.466,2.5 43.66,1.306 49.141,1.306 P6.15
  Bottom Layer w0.254: R.1 33.375,21.804 37.564,21.804 38.831,20.537 38.831,18.978 39.714,18.096 ; v1(37.437,16.521) 39.012,18.096 39.714,18.096 ; v1(40.873,18.096) 39.714,18.096
SW_RX: J1.1 P5.10 U2.11 | length 51
  Top Layer w0.254: P5.10 2.992,14.765 ; v1(9.091,20.864) 2.992,14.765 ; v1(10.361,27.951) 9.729,27.319 9.729,21.477 9.102,20.853 2.992,14.765 ; v1(21.588,22.591) 21.969,22.591 22.223,22.845 24.153,22.845 24.686,22.312 24.686,21.144 24.3,20.757 U2.11
  Bottom Layer w0.254: v1(9.091,20.864) 11.453,23.226 20.953,23.226 v1(21.588,22.591) ; v1(10.361,27.951) 12.671,27.951 J1.1
SW_TX: P5.11 R3.2 R4.1 U2.12 | length 80.2
  Top Layer w0.254: P5.11 1.9,11.326 2.436,10.79 7.838,10.79 13.2,16.152 20.803,16.152 24.785,20.134 U2.12 ; v1(36.45,6.056) R4.1 R3.2
  Bottom Layer w0.254: P5.11 1.9,13.066 2.334,13.066 3.046,13.778 5.484,13.778 6.017,13.244 6.017,8.393 5.069,7.444 5.069,3.266 18.115,3.266 18.133,3.248 20.292,3.248 20.292,4.024 21.166,4.898 33.246,4.898 33.246,5.294 34.008,6.056 v1(36.45,6.056)
"USB RX": R1.7 U3.5 | length 28.7
  Top Layer w0.254: v1(15.72,13.828) v1(18.565,13.828)
  Bottom Layer w0.254: v1(15.72,13.828) 15.72,19.785 16.682,20.747 22.947,20.747 23.75,21.55 R1.7 ; v1(18.565,13.828) 19.044,13.349 19.044,10.638 21.682,8 U3.5
"USB TX": R1.6 U3.1 | length 28.2
  Bottom Layer w0.254: R1.6 24.25,21.374 23.169,20.293 17.504,20.293 16.983,19.772 16.983,13.2 18.505,11.678 18.505,10.332 21.576,7.261 21.576,5.953 22.129,5.4 U3.1
VUSB: J2.1 P1.2 P6.1 | length 110
  Top Layer w0.254: P1.2 20.974,5.091 26.87,5.091 27.175,4.786 J2.1
  Bottom Layer w0.254: P1.2 15.546,6.865 15.212,7.199 11.123,7.199 7.338,10.984 7.338,18.756 2.436,23.658 1.42,23.658 0.81,24.268 0.81,39.076 7.77,46.036 41.489,46.036 P6.1
pads on no net: J2.4 R1.4 R1.5 U3.3 U3.6 U3.8 U3.9 U3.10 U3.11 U3.12 U3.13 U3.14 U3.19 U3.24 U3.26 U3.27 U3.28

## Silkscreen, mask and mechanical layers (free items; w line width, h text height)
Mechanical 1:
  lines w0.1: 0,0 51.8,0 51.8,47.1 0,47.1 0,0

## Text inside footprints (layer, text, board x,y; h text height)
J2: Mechanical 13 "PCB Edge" at 33.68,0.171 h0.81
P4: Top Overlay "6" at 20.161,41.833 h1.27 r180; Top Overlay "5" at 20.161,44.373 h1.27 r180; Top Overlay "2" at 29.305,41.833 h1.27 r180; Top Overlay "1" at 28.797,44.373 h1.27 r180